# Altium PCB BMS_V3.PcbDoc
Units mm, origin at the board's own origin, x right, y up, seen from the top; angles counter-clockwise.
Board outline 100.33 x 85.22 mm, 2 copper layers (Top Layer, Bottom Layer); 63 components, 42 nets, 258 pads, 50 vias.
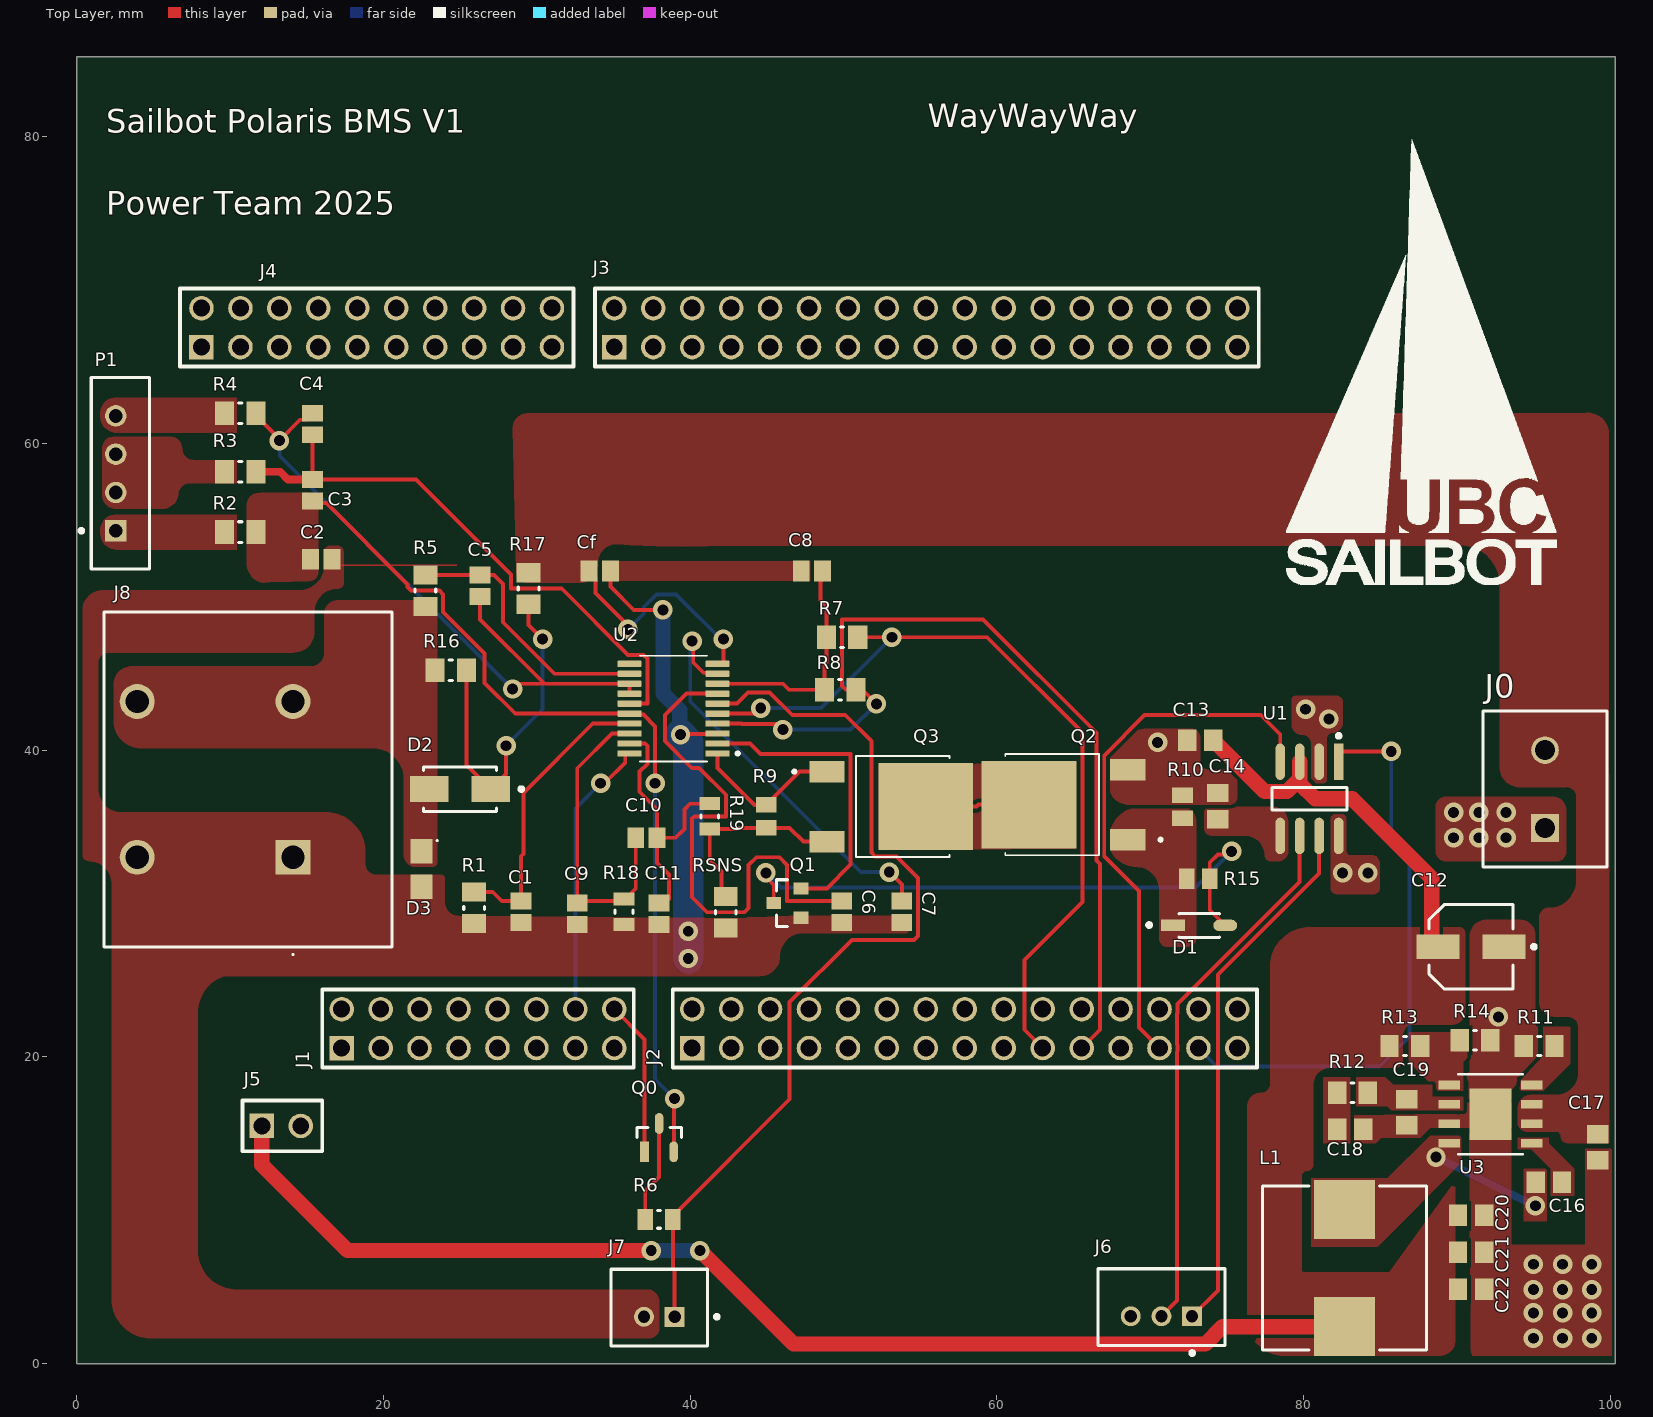
[diagram p0: Top Layer view]
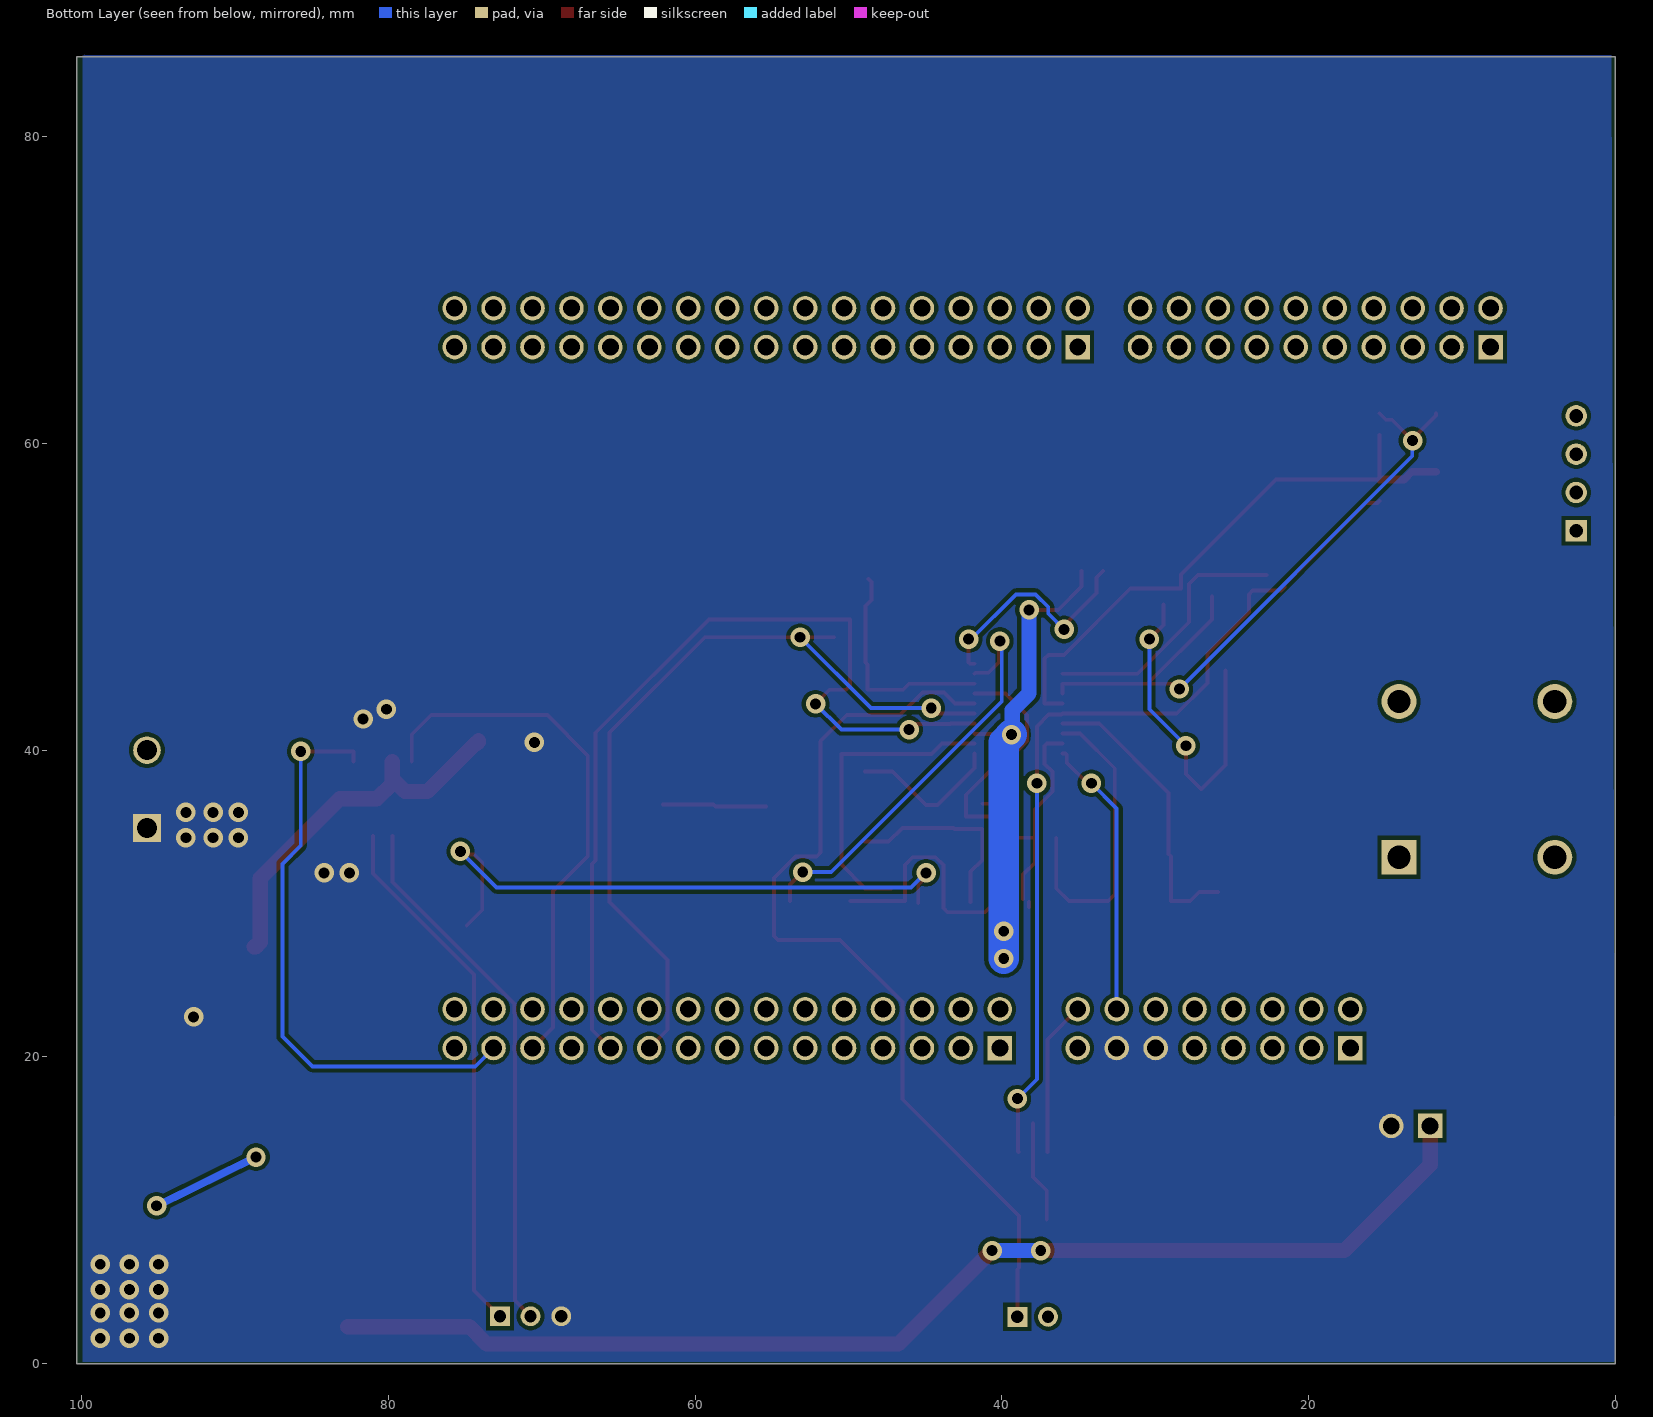
[diagram p1: Bottom Layer view, seen from below]

## Layer stack, top to bottom
Top Solder: solder mask 0.0102, Solder Resist, Dk 3.5
Top Layer: signal copper 0.0356
Dielectric 1: dielectric 0.32, FR-4, Dk 4.8
Bottom Layer: signal copper 0.0356
Bottom Solder: solder mask 0.0102, Solder Resist, Dk 3.5

## Board outline
0,0 100.33,0 100.33,85.217 0,85.217

## Design rules (kind name [scope] priority, off if disabled: settings)
Clearance [All] p1: gap=0.254 ignorepadtopadclearanceinfootprint=TRUE
PlaneConnect [All] p1: planeconnectstyle=Direct reliefexpansion=0.508 reliefentries=4 reliefconductorwidth=0.254 reliefairgap=0.254
PolygonConnect [All] p1: connectstyle=Direct reliefconductorwidth=0.254 reliefentries=4 polygonreliefangle="90 Angle" airgapwidth=0.254
RoutingVias [All] p1: holewidth=0.711 width=1.27 viastyle="Through Hole" minholewidth=0.711 minwidth=1.27 maxholewidth=0.711 maxwidth=1.27
SolderMaskExpansion [All] p1: expansion=0.13 istentingtop=FALSE useseparateexpansions=TRUE expansionbottom=0.13 istentingbottom=FALSE
SupplyNets "Schematic Supply Nets_1" [InNet('5VIN')] p1: voltage=0.000
SupplyNets "Schematic Supply Nets" [InNet('GND')] p2: voltage=0.000
Width [All] p1: maxlimit=0.254 minlimit=0.254 preferedwidth=0.254
29 further rules are at their usual default settings.

## Components (designator, comment, footprint, x,y, rotation, side; value= is the part's Value field where it differs from the comment)
C1 "1 uF 0805" CAPC2013X140X50LL20T25 28.973,29.461 r270 top
C2 "1 uF 0805" CAPC2013X140X50LL20T25 15.937,52.451 r180 top
C3 "1 uF 0805" CAPC2013X140X50LL20T25 15.367,56.958 r90 top
C4 "1 uF 0805" CAPC2013X140X50LL20T25 15.367,61.279 r90 top
C5 "1 uF 0805" CAPC2013X140X50LL20T25 26.289,50.735 r90 top
C6 "1 uF 0805" CAPC2013X140X50LL20T25 49.879,29.461 r90 top
C7 "1 uF 0805" CAPC2013X140X50LL20T25 53.806,29.461 r90 top
C8 "4.7 uF 0805" CAPC2013X140X50LL20T25 47.944,51.689 r0 top
C9 "0.1 uF" CAPC2013X140X50LL20T25 32.639,29.337 r270 top
C10 "0.1 uF" CAPC2013X140X50LL20T25 37.149,34.29 r180 top
C11 "0.1 uF" CAPC2013X140X50LL20T25 37.973,29.337 r90 top
C12 "10uF" FP-FKC-MFG 90.932,27.178 r180 top
C13 "0.1 uF" CAPC2013X135X45NL10T25 73.279,40.64 r0 top
C14 "0.1 uF" CAPC2013X135X45NL10T25 74.422,36.361 r270 top
C16 "0.1 uF" CAPC2013X135X45NL10T25 96.012,11.817 r0 top
C17 "10 uF" CAPC2013X135X45NL10T25 99.187,14.103 r90 top
C18 "3.3 nF" CAPC2013X135X45NL10T25 83.058,15.278 r180 top
C19 "47pF" CAPC2013X135X45NL10T25 86.741,16.389 r90 top
C20 "22 uF" CAPC2013X135X45NL10T25 90.932,9.658 r180 top
C21 "22 uF" CAPC2013X135X45NL10T25 90.932,7.245 r180 top
C22 "22 uF" CAPC2013X135X45NL10T25 90.932,4.832 r180 top
Cf "10 uF 0805" CAPC2013X140X50LL20T25 34.098,51.689 r180 top
D1 "1N5819HW" FP-SOD123-IPC_A 73.201,28.575 r0 top
D2 "CDBA540-HF" FP-DO-214AC-MFG 24.987,37.465 r180 top value=380pF
D3 "SMF24A-HE3-08" DIOM2818X11N 22.479,32.251 r270 top
J0 "1729128" PHOE-1729128-2_V 95.758,37.465 r90 top
J1 "CN8 CONN HDR 16POS" CN8_8X2_PADS 17.272,20.574 r90 top
J2 "CN9 CONN HDR 30POS" CN9_15X2_PADS 40.132,20.574 r90 top
J3 "CN10 CONN HDR 34POS" CN10_17X2_PADS 35.052,66.294 r90 top
J4 "CN7 CONN HDR 20POS" CN7_10X2_PADS 8.128,66.294 r90 top
J5 "5V_EXT" 5V_EXT 12.065,15.494 r90 top
J6 "440054-3" FP-440054-3-MFG 70.739,3.683 r0 top
J7 "440054-2" FP-440054-2-MFG 37.989,3.648 r0 top
J8 "39970-0102" 399700102 14.097,33.02 r90 top
L1 "5.5 uH" WE-HCI_1050 82.677,6.229 r0 top
P1 "B4B-EH-A(LF)(SN)" JST-B4B-EH-A_V 2.54,58.059 r90 top
Q0 "2N7002NXAKR" FP-SOT23-IPC_B 37.973,14.732 r90 top
Q1 "IRLML6401TRPBF" FP-SOT23-MFG 46.336,30.032 r180 top
Q2 "TSM090N03CPROG" TRANS_TSM090N03CPROG 64.348,36.449 r180 top
Q3 "TSM090N03CPROG" TRANS_TSM090N03CPROG 53.127,36.322 r0 top
R1 "100 Ohm 0805" RESC2013X60X30ML20T20 25.908,29.718 r90 top
R2 "100 Ohm 0805" RESC2013X60X30ML20T20 10.659,54.229 r0 top
R3 "100 Ohm 0805" RESC2013X60X30ML20T20 10.659,58.166 r0 top
R4 "100 Ohm 0805" RESC2013X60X30ML20T20 10.659,61.976 r0 top
R5 "100 Ohm 0805" RESC2013X60X30ML20T20 22.733,50.41 r90 top
R6 "RC0805FR-0710KL" RESC2013X60X35NL10T20 37.973,9.398 r180 top
R7 "10k Ohm 0805" RESC2013X60X30ML20T20 49.911,47.371 r180 top
R8 "10k Ohm 0805" RESC2013X60X30ML20T20 49.784,43.942 r180 top
R9 "ERA-6AEB105V" RESC2013X60X40LL20T25 44.958,35.687 r90 top
R10 "ERA-6AEB105V" RESC2013X60X40LL20T25 72.114,36.321 r270 top
R11 "200k" RESC2013X60X35ML10T20 95.377,20.707 r0 top
R12 "14k" RESC2013X60X35ML10T20 83.201,17.659 r0 top
R13 "115k" RESC2013X60X35ML10T20 86.614,20.707 r180 top
R14 "22.1k" RESC2013X60X35ML10T20 91.186,21.082 r180 top
R15 "1M Ohm" RESC2013X60X40LL20T25 73.14,31.623 r0 top
R16 "10k Ohm 0805" RESC2013X60X30ML20T20 24.384,45.212 r0 top
R17 "100 Ohm 0805" RESC2013X60X30ML20T20 29.464,50.546 r90 top
R18 "100" RESC2013X50X30LL20T20 35.687,29.464 r90 top
R19 "100" RESC2013X50X30LL20T20 41.275,35.687 r90 top
RSNS "5m Ohm 0805" RESC2013X60X30ML20T20 42.319,29.436 r270 top
U1 "MCP2562FDT-H/SN" FP-C04-057-SN-IPC_A 80.391,36.83 r270 top
U2 "BQ7692006PW" BQ7692006PW 38.913,42.713 r180 top
U3 "AP64350SP-13" SO-8EP_DIO 92.202,16.262 r180 top

## Footprints (in the part's own frame and the unit in brackets; to place one, negate y for a bottom-side part, rotate by r counter-clockwise, add the part's x,y. Pads: shape width x height; smd on the part's side, far side on the other; paste and mask are expansions set on the pad)
5V_EXT [mm]
  rect 1.6x1.6 hole 1.1: 1(0,0)
  round 1.6 hole 1.1: 2(0,-2.54)
  silkscreen extent -1.65,-3.94 1.65,1.27
399700102 [mm]
  rect 2.28x2.28 hole 1.52: 1(0,0)
  round 2.28 hole 1.52: 2(0,10.16) 3(10.16,0) 4(10.16,10.16)
  silkscreen extent -6.4,-6.47 16,12.33
BQ7692006PW [mm]
  rrect25% 1.57x0.41 smd: 1(-2.87,2.925) 2(-2.87,2.275) 3(-2.87,1.625) 4(-2.87,0.975) 5(-2.87,0.325) 6(-2.87,-0.325) 7(-2.87,-0.975) 8(-2.87,-1.625) 9(-2.87,-2.275) 10(-2.87,-2.925) 11(2.87,-2.925) 12(2.87,-2.275) 13(2.87,-1.625) 14(2.87,-0.975) 15(2.87,-0.325) 16(2.87,0.325) 17(2.87,0.975) 18(2.87,1.625) 19(2.87,2.275) 20(2.87,2.925)
  silkscreen extent -4.29,-3.45 2.2,3.45, body extent -3.2,-3.25 3.2,3.25, height 1.2
CAPC2013X135X45NL10T25 [mm] "Chip Capacitor, 2-Leads, Body 2.10x1.35mm, IPC Medium Density"
  rect 1.2x1.4 smd: 1(-0.85,0) 2(0.85,0)
  body extent -1.05,-0.67 1.05,0.67, height 1.35
CAPC2013X140X50LL20T25 [mm] "Chip Capacitor, 2-Leads, Body 2.00x1.25mm, IPC High Density"
  rect 1.1x1.35 smd: 1(-0.7,0) 2(0.7,0)
  body extent -1.1,-0.72 1.1,0.72, height 1.4
CN7_10X2_PADS [mm]
  rect 1.6x1.6 hole 1.1: 1(0,0)
  round 1.6 hole 1.1: 2(2.54,0) 3(0,-2.54) 4(2.54,-2.54) 5(0,-5.08) 6(2.54,-5.08) 7(0,-7.62) 8(2.54,-7.62) 9(0,-10.16) 10(2.54,-10.16) 11(0,-12.7) 12(2.54,-12.7) 13(0,-15.24) 14(2.54,-15.24) 15(0,-17.78) 16(2.54,-17.78) 17(0,-20.32) 18(2.54,-20.32) 19(0,-22.86) 20(2.54,-22.86)
  silkscreen extent -1.27,-24.26 3.81,1.4
CN8_8X2_PADS [mm]
  rect 1.6x1.6 hole 1.1: 1(0,0)
  round 1.6 hole 1.1: 2(2.54,0) 3(0,-2.54) 4(2.54,-2.54) 5(0,-5.08) 6(2.54,-5.08) 7(0,-7.62) 8(2.54,-7.62) 9(0,-10.16) 10(2.54,-10.16) 11(0,-12.7) 12(2.54,-12.7) 13(0,-15.24) 14(2.54,-15.24) 15(0,-17.78) 16(2.54,-17.78)
  silkscreen extent -1.27,-19.05 3.81,1.27
CN9_15X2_PADS [mm]
  rect 1.6x1.6 hole 1.1: 1(0,0)
  round 1.6 hole 1.1: 2(2.54,0) 3(0,-2.54) 4(2.54,-2.54) 5(0,-5.08) 6(2.54,-5.08) 7(0,-7.62) 8(2.54,-7.62) 9(0,-10.16) 10(2.54,-10.16) 11(0,-12.7) 12(2.54,-12.7) 13(0,-15.24) 14(2.54,-15.24) 15(0,-17.78) 16(2.54,-17.78) 17(0,-20.32) 18(2.54,-20.32) 19(0,-22.86) 20(2.54,-22.86) 21(0,-25.4) 22(2.54,-25.4) 23(0,-27.94) 24(2.54,-27.94) 25(0,-30.48) 26(2.54,-30.48) 27(0,-33.02) 28(2.54,-33.02) 29(0,-35.56) 30(2.54,-35.56)
  silkscreen extent -1.27,-36.83 3.81,1.27
CN10_17X2_PADS [mm]
  rect 1.6x1.6 hole 1.1: 1(0,0)
  round 1.6 hole 1.1: 2(2.54,0) 3(0,-2.54) 4(2.54,-2.54) 5(0,-5.08) 6(2.54,-5.08) 7(0,-7.62) 8(2.54,-7.62) 9(0,-10.16) 10(2.54,-10.16) 11(0,-12.7) 12(2.54,-12.7) 13(0,-15.24) 14(2.54,-15.24) 15(0,-17.78) 16(2.54,-17.78) 17(0,-20.32) 18(2.54,-20.32) 19(0,-22.86) 20(2.54,-22.86) 21(0,-25.4) 22(2.54,-25.4) 23(0,-27.94) 24(2.54,-27.94) 25(0,-30.48) 26(2.54,-30.48) 27(0,-33.02) 28(2.54,-33.02) 29(0,-35.56) 30(2.54,-35.56) 31(0,-38.1) 32(2.54,-38.1) 33(0,-40.64) 34(2.54,-40.64)
  silkscreen extent -1.27,-42.04 3.81,1.27
DIOM2818X11N [mm] "Molded Diode, 2-Leads, Body 2.80x1.80mm, IPC Medium Density"
  rect 1.6x1.45 smd: 1(-1.15,0) 2(1.15,0)
  silkscreen extent -1.9,0.98 -1.8,1.07, body extent -1.67,-0.95 1.67,0.95, height 1.08
FP-440054-2-MFG [mm]
  rect 1.3x1.3 hole 0.8 paste-2539.97 mask+0: 1(1,-0.6)
  round 1.3 hole 0.8 paste-2539.97 mask+0: 2(-1,-0.6)
  silkscreen extent -3.15,-2.5 3.88,2.5, body extent -3.25,-2.6 3.25,2.6, height 0.25
FP-440054-3-MFG [mm]
  rect 1.3x1.3 hole 0.8 paste-2539.97 mask+0: 1(2,-0.6)
  round 1.3 hole 0.8 paste-2539.97 mask+0: 2(0,-0.6) 3(-2,-0.6)
  silkscreen extent -4.15,-3.12 4.15,2.5, body extent -4.25,-2.6 4.25,2.6, height 0.25
FP-C04-057-SN-IPC_A [mm]
  rect 2.377x0.622 smd paste+0 mask+0: 1(-2.418,1.905)
  rrect100% 2.377x0.622 smd paste+0 mask+0: 2(-2.418,0.635) 3(-2.418,-0.635) 4(-2.418,-1.905) 5(2.418,-1.905) 6(2.418,-0.635) 7(2.418,0.635) 8(2.418,1.905)
  silkscreen extent -4.23,-2.45 0.73,2.45, body extent -4.11,-2.95 4.11,2.95, height 0.25
FP-DO-214AC-MFG [mm]
  rect 2.5x1.7 smd paste+0 mask+0: 1(-2,0) 2(2,0)
  silkscreen extent -4.13,-1.45 2.37,1.45, body extent -3.35,-1.55 3.35,1.55, height 0.25
FP-FKC-MFG [mm]
  rect 2.8x1.6 smd paste+0 mask+0: 1(-2.15,0) 2(2.15,0)
  silkscreen extent -4.23,-2.75 2.75,2.75, body extent -3.8,-3 3.8,3, height 0.25
FP-SOD123-IPC_A [mm]
  rect 1.557x0.742 smd paste+0 mask+0: 1(-1.7,0)
  rrect100% 1.557x0.742 smd paste+0 mask+0: 2(1.7,0)
  silkscreen extent -3.39,-0.78 1.33,0.78, body extent -1.83,-0.77 1.83,0.77, height 1.45
FP-SOT23-IPC_B [mm]
  rect 1.355x0.562 smd paste+0 mask+0: 1(-0.925,0.95)
  rrect100% 1.355x0.562 smd paste+0 mask+0: 2(-0.925,-0.95) 3(0.925,0)
  silkscreen extent 0,-1.45 0.65,1.45, body extent -1.85,-1.7 1.85,1.7, height 0.25
FP-SOT23-MFG [mm]
  rect 0.972x0.802 smd paste+0 mask+0: 1(-0.885,0.95) 2(-0.885,-0.95) 3(0.885,0)
  silkscreen extent -0.02,-1.52 0.7,1.52, body extent -1.47,-1.62 1.47,1.62, height 0.25
JST-B4B-EH-A_V [mm] "Header, 4-Leads, Body 12.5x3.8mm, Pitch 2.5mm"
  rect 1.4x1.4 hole 0.9: 1(-3.75,0)
  round 1.4 hole 0.9: 2(-1.25,0) 3(1.25,0) 4(3.75,0)
  silkscreen extent -6.25,-2.2 6.25,2.37, body extent -6.25,-2.2 6.25,1.6, height 6
PHOE-1729128-2_V [mm] "Receptacle, 2-Leads, Body 8.1x10.16mm, Pitch 5.08mm"
  rect 1.8x1.8 hole 1.3: 1(-2.54,0)
  round 1.8 hole 1.3: 2(2.54,0)
  silkscreen extent -5.08,-4.05 5.08,4.05, body extent -5.65,-4.05 5.08,4.05, height 10.01
RESC2013X50X30LL20T20 [mm] "Chip Resistor, 2-Leads, Body 2.00x1.25mm, IPC High Density"
  rect 0.85x1.35 smd: 1(-0.825,0) 2(0.825,0)
  silkscreen extent -0.1,-0.58 0.1,0.57, body extent -1.1,-0.72 1.1,0.72, height 0.5
RESC2013X60X30ML20T20 [mm] "Chip Resistor, 2-Leads, Body 2.00x1.25mm, IPC Low Density"
  rect 1.25x1.55 smd: 1(-1.025,0) 2(1.025,0)
  silkscreen extent -0.1,-0.67 0.1,0.67, body extent -1.1,-0.72 1.1,0.72, height 0.6
RESC2013X60X35ML10T20 [mm] "Chip Resistor, 2-Leads, Body 2.1x1.35mm, IPC Low Density"
  rect 1.2x1.45 smd: 1(-1,0) 2(1,0)
  silkscreen extent -0.1,-0.63 0.1,0.62, body extent -1.05,-0.68 1.05,0.67, height 0.6
RESC2013X60X35NL10T20 [mm] "Chip Resistor, 2-Leads, Body 2.1x1.35mm, IPC Medium Density"
  rect 1x1.35 smd: 1(-0.9,0) 2(0.9,0)
  silkscreen extent -0.1,-0.58 0.1,0.58, body extent -1.05,-0.68 1.05,0.67, height 0.6
RESC2013X60X40LL20T25 [mm] "Chip Resistor, 2-Leads, Body 2.00x1.25mm, IPC High Density"
  rect 1x1.35 smd: 1(-0.75,0) 2(0.75,0)
  body extent -1.1,-0.72 1.1,0.72, height 0.6
SO-8EP_DIO [mil]
  rect 56x22 smd paste+0 mask+0: 1(-106,75) 2(-106,25) 3(-106,-25) 4(-106,-75) 5(106,-75) 6(106,-25) 7(106,25) 8(106,75)
  rect 107x132 smd paste-65.5 mask+0: EPAD(0,0)
  silkscreen extent -83,-102 83,103, body extent -120,-97 120,97, height 64
TRANS_TSM090N03CPROG [mm]
  rect 2.29x1.4 smd: 1(-4.19,2.285) 3(-4.19,-2.285)
  rect 6.18x5.69 smd paste-4: 2(2.245,0)
  silkscreen extent -6.43,-3.3 3.8,3.3, body extent -5.05,-3.3 5.05,3.3, height 2.3
WE-HCI_1050 [mm] "SMT Flat Wire High Current Inductor, body 10.2x10.2mm"
  rect 4x3.85 smd: 1(0,3.825) 2(0,-3.825)
  silkscreen extent -5.35,-5.35 5.35,5.35, body extent -5.1,-5.5 5.1,5.5, height 5

## Part data
C1 C2 C3 C4 C5 C6 C7 C8 C9 C10 Cf: library part CMP-2007-03234-1, Manufacturer=Kemet, Part Number=C0805C105K3RACTU
C11: library part CMP-2007-03234-1, Manufacturer=Kemet
C12: library part CMP-05427-000030-1, "CAP ALUM 10UF 20% 50V SMD", Case/Package=Radial, Dielectric Material=Aluminium, ESR (Equivalent Series Resistance)=1.52R, Leakage Current=3uA, Max Operating Temperature=105°C, Min Operating Temperature=-55°C, Package Quantity=1000, Ripple Current=85mA, Tolerance=20%, Voltage=50V, Capacitance=10uF, Construction=Cylindrical, Contact Plating=Tin, Diameter=5mm, Height=5.8mm, Height - Seated (Max)=0.228inch, Impedance=1.52R, Lead Free="Lead Free", Length=5.8mm, Life (Hours)=2000Hour, Material=Aluminium, Mount="Surface Mount", Number of Pins=2, Packaging="Tape and Reel", Radiation Hardening=No, REACH SVHC="No SVHC", Ripple Current (AC)=85mA, RoHS Compliant=Yes, Series=FK, Termination=SMD/SMT, Voltage Rating=50V, Voltage Rating (DC)=50V, Width=6.5mm
C13 C14 C16 C17 C18 C19 C20 C21 C22: library part CMP-1662-00015-2, "Chip Capacitor, 4.7 uF, +/- 10%, 16 V, -55 to 85 degC, 0805 (2012 Metric), RoHS, Tape and Reel", Capacitance="4.7 uF", Case Code (Imperial)=0805, Case Code (Metric)=2012, Max Operating Temperature="85 degC", Min Operating Temperature="-55 degC", Package Quantity=3000, PartNumber=GRM21BR61C475KA88L, Tolerance=10%, Type (Capacitors)=X5R, Voltage Rating="16 V", Case\/Package=0805, ComponentLink1Description="Manufacturer URL", ComponentLink1URL=http://www.murata.com/, ComponentLink2Description=Datasheet, ComponentLink2URL=http://search.murata.co.jp/Ceramy/image/img/A01X/G101/ENG/GRM21BR61C475KA88-01.pdf, DatasheetVersion=03/2016, Height="1.25 mm", Length="2 mm", Mount="Surface Mount", Mounting Technology="Surface Mount", PackageDescription="2-Pin Surface Mount Device, Body 2 x 1.25 mm", PackageReference=0805, Packaging="Tape and Reel", Pins=2, Radiation Hardening=No, REACH SVHC="No SVHC", RoHSCompliant=true, Voltage Rating (DC)="16 V", Width="1.25 mm"
D1: library part CMP-0303-00003-3, "DIODE SCHOTTKY 40V 1A SOD123", Average Rectified Current=1A, Capacitance=110pF, Case/Package=SOD-123-2, Forward Voltage=450mV, Max Forward Surge Current (Ifsm)=25A, Max Operating Temperature=125°C, Max Power Dissipation=450mW, Max Repetitive Reverse Voltage (Vrrm)=40V, Min Operating Temperature=-65°C, Package Quantity=3000, Peak Reverse Current=50uA, Contact Plating=Tin, Current Rating=1A, Element Configuration=Single, Forward Current=1A, Height=1.25mm, Lead Free="Lead Free", Length=2.85mm, Max Reverse Voltage (DC)=40V, Number of Pins=2, Output Current=1A, Packaging="Tape and Reel", Peak Non-Repetitive Surge Current=25A, Polarity=Standard, Radiation Hardening=No, REACH SVHC="No SVHC", Termination=SMD/SMT, Voltage Rating (DC)=40V, Weight=0.000353oz, Width=1.7mm
D2: library part CMP-20227-000001-1, "DIODE SCHOTTKY 40V 5A DO214AC", Capacitance=380pF, Forward Current=5A, Manufacturer=Comchip, Max Junction Temp=+150°C, Max Repetitive Reverse Voltage=40V, Max Surge Forward Current=125A, Package=DO-214AC, Peak Reverse Current=0.5mA, Temperature="-50°C to +150°C", Temperature Range Low=-50°C, Automotive=No, Category=Diode, ComponentLink2Description=Datasheet, ComponentLink2URL=http://www.comchiptech.com/admin/files/product/CDBA540-HF%20Thru504741.%20CDBA5200-HF%20RevC.pdf, Device Class L1="Discrete Semiconductors", Device Class L2=Diodes, Device Class L3="Schottky Diodes", Digikey Description="DIODE SCHOTTKY 40V 5A DO214AC", Height=2.5mm, Lead Free=Yes, Manufacturer Part Number=CDBA540-HF, Mouser Description="Schottky Diodes & Rectifiers 40V, 5A", Octopart=https://octopart.com/cdba540-hf-comchip-57839773, RoHS=TRUE, Standoff Height=0.08mm, Temperature Range High=+150°C
D3: library part CMP-004-00031-1, "Trans Voltage Suppressor Diode, 1000W, 24V V(RWM), Unidirectional, 1 Element, Silicon, DO-219AB", Max Operating Temperature=150°C, Min Operating Temperature=-55°C, Pins=2, RoHS Compliant=Yes
J0: library part CMP-2000-05815-1, "PCB Terminal Block, 13.5 A, 400 V, 2-Pin THD, RoHS, Bulk", Current Rating=13500mA, Manufacturer="Phoenix Contact", Package Description="2-Pin Through Hole Device, Body 8.1 x 10.16 mm, Pitch 5.08 mm", Package Reference=1729128-2, Package Version=03/2015, Voltage Rating=400V, Datasheet URL=https://datasheet.ciiva.com/16046/1729128-16046181.pdf, Datasheet Version=12/2013, Manufacturer URL=http://www.phoenixcontact.com/, Mounting Technology=ThroughHole, No. of Positions=2, No. of Rows=1, Orientation=Horizontal, Package URL=https://www.phoenixcontact.com/online/portal/pi/pxc/product_detail_page/!ut/p/b1/3VdJjqNKFDxLH8AFycySyWY2ozFsEPOMMQaDOX1XedGL_1Vdm5YXJleknhSKeBkvI6EA8ncAo3AYoDhBQGco6KN7VURTdemj9us_IEKEZo_YHiPAEWEFmDGOHMORkqKYCORBZxgL7ZoaZYcbFFUZ3fqxSY6GOuxydWUuHqz1ynmMFygu583Bob0Ewr6Sd_l-5m-kAueHiB0jpRwZwe58wwtkpxtMYd_LmGcDRU02dRNEyWt6Y2ti5pSyJ_reIkzIulrqApdnbT11V5jnCKbYNCvhEM1MCpPByat_X379-iThf08CI5GfOPqfBeS3BRoBOdD55AKVv0iLwCMq-2BrzXWSGRH7pUGD9uwXQjiph3xL0DKQwdGa0JImiIOmBNOestqgwTHSSs2oOep-78apyXQBvNi8ZLaFjvjWvcaUEBu0MC6Wbe-d6mB0FAebo2lUWinqYaZs5DAYzV0RP9yitUjnGJ0iI9xhZkT42OCQNUJJhkgWINNQLP2JFP6OpMg3JCVg70jqHT0lvKOnhHf0lPuOnnLf0VPuWx6_dxwUIvwk5WMkT0kLL1mh61l2yZVSzG3pYV_bqo-mj6uMKwKwdnnW8Jh5RTOJzMOA5c-eJDaZQw4mTMPH02PvS_ZAqNVjVTo2WyYLkwH_KU1mmmG5kjRhDqPXLwwVHvVOjCM60-fpXvTDfMGW1PVFVS1r4e4yVDk4ZdNbkUHvqPqQSeian4UD39fNKmachqdJ1NJbyk8rXT9mXTvPk3oE5meulKGgiruPJek-4I9hTT6G8ZLOyRSm2RRVbThERQad5OS28hdt4YW4vG0stgYYzsWsK4_7y6DZMjJSCqri1kyiZR5vD7pwIrNR7QwPHTcLTI5qT7eRlpHrdGiupYlqQDJ7zy_CND8fWWBoLRXxk1RVcXiBQwbTD4Xi7KL-FuO94t9xaqweXzH, Packing=Bulk, PartNumber=1729128, Pitch=5.08mm, RoHS=TRUE
J1: library part CMP-002-00076-1, "CN8 CONN HDR 16POS 0.1 STACK", Design Item ID="CN8 CONN HDR 16POS", Source=Schlib2.SchLib
J2: library part CMP-002-00077-1, "CN9 CONN HDR 30 POS  0.1 STACK", Design Item ID="CN9 CONN HDR 30POS", Source=Schlib2.SchLib
J3: library part CMP-002-00078-1, "CN10 CONN HDR 34 POS  0.1 STACK", Design Item ID="CN10 CONN HDR 34POS", Source=Schlib2.SchLib
J4: library part CMP-002-00075-1, "CN7 CONN HDR 20 POS  0.1 STACK", Design Item ID="CN7 CONN HDR 20POS", Source=Schlib2.SchLib
J5: library part CMP-013-000005-1, Design Item ID=5V_EXT, Source=Schlib2.SchLib
J6: library part CMP-03369-000008-1, "CONN HEADER VERT 3POS 2MM", Current Rating=3A, Manufacturer="TE Connectivity", Package=0, Temperature="-25°C to +105°C", Temperature Range High=+105°C, Temperature Range Low=-25°C, Voltage Rating=250V, Automotive=No, Category=Conn, ComponentLink2Description=Datasheet, ComponentLink2URL=https://www.te.com/usa-en/product-440054-3.datasheet.pdf, Conn Gender=Male, Conn Orientation=Vertical, Contact Material=Tin,Nickel, Device Class L1=Connectors, Device Class L2="Headers and Wire Housings", Device Class L3=unset, Digikey Description="CONN HEADER VERT 3POS 2MM", Footprint Url=https://www.te.com/commerce/DocumentDelivery/DDEController?Action=showdoc&DocId=Customer+Drawing%7F440054%7FF6%7Fpdf%7FEnglish%7FENG_CD_440054_F6.pdf%7F440054-3, Height=6.35mm, Lead Free=Yes, Manufacturer Part Number=440054-3, Mouser Description="Headers & Wire Housings 3 POS HDR VERT 2.0mm", Number Of Contacts=3, Number Of Rows=1, Octopart=https://octopart.com/440054-3-te+connectivity-40394845, Pitch=2mm, RoHS=TRUE
J7: library part CMP-03369-000005-1, "CONN HEADER VERT 2POS 2MM", Current Rating=3A, Manufacturer="TE Connectivity", Temperature="-25°C to +85°C", Temperature Range High=+85°C, Temperature Range Low=-25°C, Voltage Rating=250V, Automotive=No, Category=Conn, ComponentLink2Description=Datasheet, ComponentLink2URL=https://www.te.com/usa-en/product-440054-2.datasheet.pdf, Conn Gender=Male, Conn Orientation=Vertical, Contact Material=Tin,Nickel, Device Class L1=Connectors, Device Class L2="Headers and Wire Housings", Device Class L3=unset, Digikey Description="CONN HEADER VERT 2POS 2MM", Footprint Url=https://www.te.com/commerce/DocumentDelivery/DDEController?Action=showdoc&DocId=Customer+Drawing%7F440054%7FF6%7Fpdf%7FEnglish%7FENG_CD_440054_F6.pdf%7F440054-2, Height=6.35mm, Lead Free=Yes, Manufacturer Part Number=440054-2, Mouser Description="Headers & Wire Housings 2.0mm HDR 2pos VERT HPI", Number Of Contacts=2, Number Of Rows=1, Octopart=https://octopart.com/440054-2-te+connectivity-40237927, Package=440054-2, Pitch=2mm, RoHS=TRUE
J8: "10.16mm Beau Eurostyle Fixed Mount PCB Terminal Block, High Power 40A,  Circuits", Manufacturer_Name=Molex, Mouser Part Number=538-39970-0102, Datasheet Link=https://www.molex.com/pdm_docs/sd/399700102_sd.pdf, Geometry.Height=30mm, Manufacturer_Part_Number=39970-0102, Mouser Price/Stock=https://www.mouser.co.uk/ProductDetail/Molex/39970-0102?qs=E1QQzziZK0%252BNAsw%2FMf08Pw%3D%3D
L1: library part CMP-0226-00138-2, Ambient Temperature Range High=100°C, Ambient Temperature Range Low=-40°C, Case/Package=1050, Current Rating=10A, DC Resistance (DCR)=10.3mΩ, Inductance=5.5µH, Inductance Tolerance=20%, Max Operating Temperature=150°C, Saturation Current=12A, Self Resonant Frequency=30MHz, Series Resistance=10.3Ω, Test Frequency=100kHz, Composition=Wirewound, Depth=10.2mm, Height=4.7mm, Height - Seated (Max)=5.0038mm, Lead Free="Lead Free", Length=10.5mm, Max DC Current=10A, Min Operating Temperature=-40°C, Mount="Surface Mount", NexarPartId=7866439, Number of Pins=2, Packaging="Cut Tape (CT)", REACH SVHC=Unknown, Resistance=10.3mΩ, RMS Current (Irms)=10A, RoHS=Compliant, Shielding=Shielded, Termination=SMD/SMT, Tolerance=20%, Width=10.2mm
P1: library part CMP-2000-05904-1, "Male Header, Pitch 2.5 mm, 1 x 4 Position, Height 6 mm, Tail Length 3.2 mm, -25 to 85 degC, RoHS, Bulk", Manufacturer=JST, Package Description="Male Header, Pitch 2.5 mm, 1 x 4 Position, Height 6 mm, Tail Length 3.2 mm", Package Reference=B4B-EH-A, Datasheet URL=http://www.jst-mfg.com/product/pdf/eng/eEH.pdf, Datasheet Version=12/2012, Manufacturer URL=http://www.jst.com/home2.html, Mounting Technology=SurfaceMount, No of Positions=4, Pitch=2.5mm, Style/Orientation=StraightHeader/Plug, Termination=Crimp, Type=ShroudedHeader
Q0: library part CMP-14409-000026-2, "2N7002NXAK/SOT23/TO-236AB"
Q1: library part CMP-32901-000098-1, "MOSFET P-CH 12V 4.3A SOT-23", Continuous Drain Current=-4.3A, Drain To Source Breakdown Voltage=-12V, Drain To Source Resistance=0.05Ω, Gate To Source Voltage=8V, Input Capacitace At Vds="830pF @ -10V", Manufacturer=Infineon, Max Forward Diode Voltage=-1.2V, Max Junction Temp=+150°C, Package=SOT23, Power Dissipation=1.3W, Pulse Drain Current=-34A, Temperature="-55°C to +150°C", Temperature Range Low=-55°C, Automotive=No, Category=Trans, ComponentLink2Description=Datasheet, ComponentLink2URL=https://www.infineon.com/dgdl/irlml6401pbf.pdf?fileId=5546d462533600a401535668b96d2634, Depletion Mode=False, Device Class L1="Discrete Semiconductors", Device Class L2=Transistors, Device Class L3=MOSFETs, Digikey Description="MOSFET P-CH 12V 4.3A SOT-23", Drain To Source Voltage=-12V, Gate Charge At Vgs="10nC @ -5V", Height=1.12mm, Ipc Land Pattern Name=SOT95P237X100-3, Lead Free=Yes, Manufacturer Part Number=IRLML6401TRPBF, Number Of Channels=1, Number Of P Channels=1, Octopart=https://octopart.com/irlml6401trpbf-infineon-65874987, Reverse Recovery Charge=8nC, Reverse Recovery Time=22ns, RoHS=TRUE, Rthja Max=75°C/W, Standoff Height=0.01mm, Temperature Range High=+150°C, Threshold Vgs Max=-0.95V, Threshold Vgs Min=-0.4V, Turn Off Delay Time=250ns, Turn On Delay Time=11ns
Q2 Q3: library part CMP-013-00034-1, "N-Channel 30 V 50A (Tc) 40W (Tc) Surface Mount TO-252 (DPAK)", Case/Package="TO-252-3 Taiwan Semiconductor", Check_prices=https://www.snapeda.com/parts/TSM090N03CPROG/taiwan/view-part/?ref=eda, Component Type=Standard, Design Item ID=TSM090N03CPROG, MF="Taiwan Semiconductor", MP=TSM090N03CPROG, Pins=3, SnapEDA_Link=https://www.snapeda.com/parts/TSM090N03CPROG/taiwan/view-part/?ref=snap, Source=TSM090N03CPROG.SchLib
R1 R2 R3 R4 R5 R7 R8 R16 R17 RSNS: library part CMP-2001-01991-1, Manufacturer="KOA Speer", Part Number=RK73H2ATTD1000F
R6: library part CMP-1659-00013-4, "Chip Resistor, 10 KOhm, +/- 1%, 0.125 W, -55 to 155 degC, 0805 (2012 Metric), RoHS, Tape and Reel", Manufacturer=Yageo, Max Operating Temperature="155 degC", Min Operating Temperature="-55 degC", Package Quantity=5000, Voltage Rating="150 V", ComponentLink1Description="Manufacturer URL", ComponentLink1URL=http://www.yageo.com/, ComponentLink2Description=Datasheet, ComponentLink2URL=http://www.yageo.com/documents/recent/PYu-RC_Group_51_RoHS_L_04.pdf, DatasheetVersion="Rev. 4, 02/2016", Height="0.5 mm", Length="2 mm", Mount="Surface Mount", Mounting Technology="Surface Mount", PackageDescription="2-Pin Surface Mounted Device, Body 2 x 1.25 mm", PackageReference=0805, Packaging="Tape and Reel", Pins=2, REACH SVHC="No SVHC", RoHSCompliant=true
R9 R10: library part CMP-2001-00584-1, Manufacturer=Panasonic, Part Number=ERA-6AEB105V
R11 R12 R13 R14: library part CMP-2100-03671-1, "Chip Resistor, 1 KOhm, +/- 1%, 125 mW, -55 to 155 degC, 0805 (2012 Metric), RoHS, Tape and Reel", Case Code (Imperial)=0805, Case Code (Metric)=2012, Manufacturer=Yageo, Max Operating Temperature=155degC, Max Power Dissipation=125mW, Min Operating Temperature=-55degC, Package Description="2-Pin Surface Mounted Device, Body 2 x 1.25 mm", Package Quantity=1, Resistance=1KOhm, Temperature Coefficient=100ppm/degreesC, Tolerance=1%, Voltage Rating=150V, Case/Package=0805, Composition=ThickFilm, Datasheet URL=http://www.yageo.com/NewPortal/yageodocoutput?fileName=/pdf/R-Chip/PYu-RC_Group_51_RoHS_L_5.pdf, Datasheet Version="Rev. 5, 10/2016", Depth=1.25mm, Height=0.024inch, Lead Free=LeadFree, Length=0.079inch, Manufacturer URL=http://www.yageo.com/, Military Standard=Not, Number of Pins=2, Number of Terminations=2, Package Reference=0805, Packaging=TapeandReel, Power Rating=125mW, REACH SVHC=Unknown, RoHSCompliant=true, Termination=SMD/SMT, Voltage Rating (DC)=150V, Width=0.049inch
R15: library part CMP-2001-00584-1, Manufacturer=Panasonic, Part Number=ERA-6AEB105V
R18 R19: library part CMP-2001-04901-1, Manufacturer="Vishay Dale", Part Number=CRCW0805100RFKEA
U1: library part CMP-06279-000047-1, "IC TRANSCEIVER 1/1 8SOIC", Case/Package=SOIC, Max Operating Temperature=150°C, Max Supply Voltage=5.5V, Min Operating Temperature=-40°C, Min Supply Voltage=4.5V, Operating Supply Current=70mA, Package Quantity=3300, Data Rate=8Mbps, Mount="Surface Mount", Number of Pins=8, Number of Transceivers=1, Packaging="Tape and Reel", Receiver Hysteresis=200mV, RoHS Compliant=Yes, Series=-, Weight=0.019048oz
U2: library part CMP-031-00007-1, "3 to 5-Series Cell Li-Ion and Li-Phosphate Battery Monitor (bq76940 Family)", Case/Package="TSSOP-20 Texas Instruments", Check_prices=https://www.snapeda.com/parts/BQ7692006PW/Texas+Instruments/view-part/?ref=eda, Component Type=Standard, Design Item ID=BQ7692006PW, MF="Texas Instruments", MP=BQ7692006PW, Pins=20, SnapEDA_Link=https://www.snapeda.com/parts/BQ7692006PW/Texas+Instruments/view-part/?ref=snap, Source=BQ7692006PW.SchLib
U3: library part CMP-013-000013-1, "No Description Available", Mfr_Name="Diodes Inc", Design Item ID=AP64350SP-13, RefDes=RefDes, Source=Schlib2.SchLib, Type=Type

## Via types
v1: diameter 1.27, hole 0.711, Top Layer to Bottom Layer, 50 vias

## Nets (pads, with @x,y where several pads share a name; then routed paths per layer and width w, separated by ;. In a path a pad name is that pad's centre, name@x,y a point inside that pad or via, vN(x,y) a via of type N, cw(c..) or ccw(c..) an arc to the next point about the centre after c; other vN are vias at no path point)
"3.3 VIN": C14.2 U1.5
3.3VIN: C8.2 R7.2 R8.2 U2.8 | length 14.7
  Top Layer w0.254: U2.8 46.061,44.338 46.457,43.942 R8.2 48.759,45.593 48.886,45.72 R7.2 48.886,49.417 48.514,49.789 48.514,50.989 C8.2@48.706,51.181
5VIN: C12.2 C13.2 C20.2 C21.2 C22.2 J5.1 L1.2 R13.2 U1.3 | length 103.8
  Top Layer w0.254: U1.3@79.756,38.37 U1.3
  Top Layer w1: J5.1 12.065,12.954 17.653,7.366 v1(37.465,7.366) ; v1(40.64,7.366) 46.736,1.27 73.6,1.27 74.734,2.404 L1.2 ; C13.2 74.129,40.54 74.229,40.44 74.338,40.44 77.473,37.305 78.927,37.305 79.756,38.134 U1.3 ; 79.756,37.846 80.772,36.83 83.185,36.83 88.362,31.653 88.362,27.478 88.662,27.178 C12.2
  Bottom Layer w1: v1(37.465,7.366) v1(40.64,7.366)
BAT+: C17.2 Cf.2 J0.2 R17.2 U2.10 U3.2 U3.3 | length 15.4
  Top Layer w0.254: Cf.2 33.821,51.266 33.821,50.253 35.941,48.133 v1(35.941,47.879) ; U2.10 42.086,45.638 42.164,45.716 v1(42.164,47.244)
  Bottom Layer w0.254: v1(35.941,47.879) 36.971,48.909 36.971,49.33 37.806,50.165 39.076,50.165 41.997,47.244 v1(42.164,47.244)
BAT-: C12.1 C13.1 C14.1 C17.1 C18.1 C19.1 C20.1 C21.1 C22.1 J0.1 J1.11 J1.13 J5.2 J6.3 Q2.3 R10.1 R11.1 R14.1 U1.2 U1.8 U3.7 U3.EPAD
  other v1: 94.996,1.651 96.901,1.651 98.806,1.651 94.996,3.302 96.901,3.302 98.806,3.302 94.996,4.826 96.901,4.826 98.806,4.826 94.996,6.477 96.901,6.477 98.806,6.477 92.71,22.606 82.55,32.004 84.201,32.004 89.789,34.29 91.44,34.29 93.218,34.29 89.789,35.941 91.44,35.941 93.218,35.941 70.485,40.513 81.661,42.037 80.137,42.672
CAN_RX_3.3V: J2.25 U1.4 | length 35.4
  Top Layer w0.254: J2.25 69.266,21.92 69.266,30.817 67.012,33.071 67.012,39.667 69.636,42.291 77.216,42.291 78.486,41.021 U1.4
CAN_TX_3.3V: J2.27 U1.1 | length 38.3
  Top Layer w0.254: U1.1 82.296,39.929 v1(85.725,39.929)
  Bottom Layer w0.254: J2.27 74.346,19.38 84.963,19.38 86.919,21.336 86.919,32.588 85.725,33.782 v1(85.725,39.929)
CANH: J6.1 U1.7 | length 34.8
  Top Layer w0.254: J6.1 74.422,4.766 74.422,25.36 81.026,31.964 U1.7
CANL: J6.2 U1.6 | length 35.1
  Top Layer w0.254: J6.2 71.755,4.099 71.755,20.277 ccw(c70.612,20.574) 71.755,20.871 71.755,22.817 71.793,22.855 71.793,23.114 71.793,23.449 79.756,31.412 U1.6
CHG_FET: D1.1 Q2.1 R10.2 R15.1
CHG_PIN: Q1.2 U2.2 | length 20.1
  Top Layer w0.254: U2.2 43.9,40.438 44.587,39.751 50.47,39.751 50.47,32.537 48.914,30.982 Q1.2
DSG_PIN: Q3.1 R9.2 U2.1 | length 10
  Top Layer w0.254: U2.1 41.783,38.85 44.196,36.437 R9.2 47.128,38.607 Q3.1
GND: C1.2 C2.1 C6.1 C7.1 C8.1 C9.2 C11.1 Cf.1 D3.2 J7.2 J8.1 J8.2 Q1.1 R1.1 R18.1 RSNS.2 U2.3 | length 30.9
  Top Layer w0.254: Cf.1 34.798,50.673 36.322,49.149 v1(38.227,49.149) ; v1(39.37,41.021) 39.404,41.055 41.749,41.055 U2.3
  Bottom Layer w1: v1(38.227,49.149) 38.227,43.712 39.318,42.621 39.318,41.073 v1(39.37,41.021)
  Bottom Layer w2: v1(39.37,41.021) 39.878,40.513 v1(39.878,26.416)
  other v1: 39.878,28.194
GPIOAlert: J1.14 U2.20 | length 18.4
  Top Layer w0.254: v1(34.163,37.846) 34.417,37.846 35.77,39.199 35.77,39.71 35.848,39.788 U2.20
  Bottom Layer w0.254: J1.14 32.512,36.195 v1(34.163,37.846)
GPIOBoot: J1.16 Q0.1 | length 10.1
  Top Layer w0.254: J1.16 37.023,21.143 Q0.1
NetC1_1: C1.1 R1.2 U2.17 | length 19.2
  Top Layer w0.254: R1.2 27.127,30.743 27.709,30.161 C1.1 28.973,33.083 29.126,33.236 29.126,37.215 33.649,41.738 U2.17
NetC2_2: C2.2 C3.1 Q0.2 R2.2 U2.16 | length 58.6
  Top Layer w0.254: C3.1 15.511,56.114 16.274,56.114 21.577,50.811 21.577,50.652 21.8,50.429 21.959,50.429 21.978,50.41 23.647,50.41 23.889,50.168 23.889,49.009 26.594,46.304 26.594,44.385 28.591,42.388 U2.16 36.107,42.324 36.956,42.324 37.719,41.561 v1(37.719,37.846) ; Q0.2 38.956,13.84 38.956,17.239 v1(38.989,17.272)
  Bottom Layer w0.254: v1(37.719,37.846) 37.719,18.542 v1(38.989,17.272)
NetC3_2: C3.2 C4.1 R3.2 U2.15 | length 38.1
  Top Layer w0.254: C4.1 C3.2 22.123,57.658 28.308,51.473 28.308,50.546 31.623,50.546 35.945,46.224 36.956,46.224 37.209,45.971 37.209,45.468 37.211,45.466 37.211,43.038 U2.15
  Top Layer w0.5: R3.2 13.259,58.166 13.767,57.658 C3.2
NetC4_2: C4.2 C5.1 R4.2 U2.13 U2.14 | length 43.7
  Top Layer w0.254: R4.2 11.684,61.826 13.208,60.302 v1(13.208,60.198) 14.566,61.556 14.944,61.556 C4.2 ; C5.1 26.289,48.539 30.49,44.338 ; v1(28.423,43.993) 28.768,44.338 30.49,44.338 ; U2.14 U2.13 30.49,44.338
  Bottom Layer w0.254: v1(13.208,60.198) 13.233,60.173 13.233,59.182 v1(28.423,43.993)
NetC5_2: C5.2 R5.2 U2.12 | length 17.4
  Top Layer w0.254: R5.2 C5.2 27.203,51.435 27.8,50.838 27.8,48.349 31.161,44.988 U2.12
NetC6_2: C6.2 U2.7 | length 35.8
  Top Layer w0.254: U2.7 39.751,43.688 38.354,42.291 38.354,40.6 40.107,38.847 40.578,38.847 42.331,37.095 42.331,35.687 40.281,35.687 40.132,35.538 40.132,30.408 41.104,29.436 43.533,29.436 43.815,29.718 43.815,32.512 44.323,33.02 45.822,33.02 46.33,32.512 46.33,30.161 C6.2
NetC7_2: C7.2 U2.9 | length 27.1
  Top Layer w0.254: v1(40.132,47.117) 40.199,47.05 40.199,45.723 40.87,45.052 41.719,45.052 U2.9 ; v1(52.984,32.055) 53.806,31.234 C7.2
  Bottom Layer w0.254: v1(40.132,47.117) 40.005,46.99 40.005,43.18 51.13,32.055 v1(52.984,32.055)
NetC9_1: C9.1 C10.2 R18.2 U2.18 | length 20.2
  Top Layer w0.254: U2.18 34.9,41.088 32.639,38.827 32.639,30.584 33.062,30.161 35.622,30.161 36.449,30.988 C10.2
NetC10_1: C10.1 C11.2 R19.2 U2.19 | length 17.6
  Top Layer w0.254: U2.19 37.062,40.438 37.211,40.289 37.211,39.111 36.703,38.603 36.703,37.294 37.849,36.148 C10.1 ; C11.2@38.227,29.78 C11.2@38.227,30.099 ; C11.2@38.608,30.291 38.608,31.902 37.849,32.661 C10.1 ; R19.2 39.999,36.512 39.624,36.137 39.624,34.874 39.04,34.29 C10.1
NetC16_1: C16.1 L1.1 U3.8 | length 7.2
  Bottom Layer w0.5: v1(88.646,13.462) v1(95.123,10.287)
NetC16_2: C16.2 U3.1
NetC18_2: C18.2 R12.1
NetC19_2: C19.2 R12.2 U3.6
NetD1_2: D1.2 Q1.3 R15.2 | length 40.2
  Top Layer w0.254: v1(44.944,32.004) 44.944,31.729 45.452,31.221 Q1.3 ; D1.2 73.89,29.587 R15.2 73.89,32.679 74.418,33.207 75.117,33.207 v1(75.311,33.401)
  Bottom Layer w0.254: v1(44.944,32.004) 44.969,32.004 45.934,31.039 72.949,31.039 v1(75.311,33.401)
NetD2_1: D2.1 R16.2 R17.1 | length 22.2
  Top Layer w0.254: R16.2 25.409,39.043 D2.1 27,37.465 27.997,38.461 v1(27.997,40.29) ; R17.1 29.464,48.158 v1(30.378,47.244)
  Bottom Layer w0.254: v1(27.997,40.29) 30.378,42.672 v1(30.378,47.244)
NetD2_2: D2.2 D3.1 J8.3 J8.4 R5.1 R16.1
NetJ7_1: J7.1 R6.1 U2.6 | length 60.3
  Top Layer w0.254: J7.1 38.989,6.147 38.873,6.263 R6.1 38.873,9.627 46.482,17.236 46.482,23.571 50.546,27.635 54.61,27.635 54.864,27.889 54.864,31.674 53.467,33.071 52.07,33.071 51.816,33.325 51.816,40.589 50.114,42.291 46.66,42.291 45.187,43.764 43.77,43.764 43.044,43.038 U2.6
NetP1_1: P1.1 R2.1
NetP1_2: P1.2 P1.3 R3.1
NetP1_4: P1.4 R4.1
NetQ0_3: Q0.3 R6.2 | length 6.6
  Top Layer w0.254: R6.2 37.073,11.278 37.973,12.178 Q0.3
NetQ2_2: Q2.2 Q3.2 | length 6.8
  Top Layer w0.254: Q3.2 58.674,36.322 58.801,36.449 Q2.2
NetQ3_3: Q3.3 R9.1 R19.1 RSNS.1 | length 13.1
  Top Layer w0.254: RSNS.1@42.037,30.108 42.037,32.08 41.275,32.842 R19.1 43.078,34.862 43.153,34.937 R9.1 46.482,34.937 47.382,34.037 Q3.3
NetR11_2: R11.2 U3.4
NetR13_1: R13.1 R14.2 U3.5
SCL_3.3V: J2.19 R7.1 U2.5 | length 53.3
  Top Layer w0.254: U2.5 44.242,42.388 v1(44.602,42.748) ; R7.1 v1(53.162,47.371) 59.36,47.371 65.583,41.148 65.583,30.099 61.798,26.314 61.798,21.768 J2.19
  Bottom Layer w0.254: v1(44.602,42.748) 48.539,42.748 v1(53.162,47.371)
SDA_3.3V: J2.21 R8.1 U2.4 | length 59.1
  Top Layer w0.254: U2.4 43.352,41.738 43.383,41.707 45.695,41.707 v1(46.05,41.351) ; v1(52.146,43.028) 51.232,43.942 R8.1 50.165,43.942 49.911,44.196 49.911,48.539 59.106,48.539 66.504,41.141 66.504,32.797 66.726,32.575 66.726,21.768 J2.21
  Bottom Layer w0.254: v1(46.05,41.351) 50.47,41.351 v1(52.146,43.028)
pads on no net: J1.1 J1.2 J1.3 J1.4 J1.5 J1.6 J1.7 J1.8 J1.9 J1.10 J1.12 J1.15 J2.1 J2.2 J2.3 J2.4 J2.5 J2.6 J2.7 J2.8 J2.9 J2.10 J2.11 J2.12 J2.13 J2.14 J2.15 J2.16 J2.17 J2.18 J2.20 J2.22 J2.23 J2.24 J2.26 J2.28 J2.29 J2.30 J3.1 J3.2 J3.3 J3.4 J3.5 J3.6 J3.7 J3.8 J3.9 J3.10 J3.11 J3.12 J3.13 J3.14 J3.15 J3.16 J3.17 J3.18 J3.19 J3.20 J3.21 J3.22 J3.23 J3.24 J3.25 J3.26 J3.27 J3.28 J3.29 J3.30 J3.31 J3.32 J3.33 J3.34 J4.1 J4.2 J4.3 J4.4 J4.5 J4.6 J4.7 J4.8 J4.9 J4.10 J4.11 J4.12 J4.13 J4.14 J4.15 J4.16 J4.17 J4.18 J4.19 J4.20 U2.11

## Polygon pours and split planes (outlines as drawn)
BAT- on Top Layer "BAT-_L01_P116" (solid, pour order 116): 96.266,36.957 cw(c96.266,36.068) 97.155,36.068 97.155,33.401 cw(c96.52,33.401) 96.52,32.766 89.281,32.766 cw(c89.281,33.401) 88.646,33.401 88.646,36.322 cw(c89.281,36.322) 89.281,36.957
BAT+ on Top Layer "Top Layer-BAT+" (solid, pour order 107): 29.845,50.927 29.373,50.927 cw(c29.373,51.656) 28.644,51.656 28.417,60.969 cw(c29.433,60.969) 29.433,61.985 98.267,61.985 cw(c98.517,60.584) 99.918,60.833 99.918,38.471 99.949,38.481 99.949,14.351 97.282,14.351 cw(c97.282,14.859) 96.774,14.859 ccw(c96.52,14.859) 96.52,15.113 94.615,15.113 cw(c94.615,15.748) 93.98,15.748 93.98,16.637 cw(c94.869,16.637) 94.869,17.526 96.52,17.526 ccw(c96.52,18.923) 97.917,18.923 97.917,21.971 ccw(c97.282,21.971) 97.282,22.606 96.393,22.606 cw(c96.393,23.622) 95.377,23.622 95.377,29.083 cw(c96.012,29.083) 96.012,29.718 ccw(c96.012,31.496) 97.79,31.496 97.79,36.957 ccw(c97.155,36.957) 97.155,37.592 97.183,37.601 94.076,37.601 cw(c94.076,38.871) 92.806,38.871 92.806,50.809 ccw(c90.266,50.809) 90.266,53.349 41.969,53.349 cw(c39.272,111.62) 35.265,53.424 ccw(c35.179,52.235) 33.988,52.168 33.993,52.075 33.993,51.9 cw(c33.02,51.9) 33.02,50.927
NetC16_1 on Top Layer "NETC16_1_L01_P014" (solid, pour order 14): 80.518,7.626 84.836,7.626 90.297,13.087 90.297,14.738 90.17,14.865 88.265,14.865 85.471,12.071 80.518,12.071
BAT- on Top Layer "Top Layer-BAT-" (solid, pour order 82): 90.926,0.514 100.116,0.514 100.116,13.926 100.029,14.013 98.378,14.013 98.378,7.753 93.552,7.753 93.552,17.833 93.616,17.896 95.281,19.805 95.281,21.977 cw(c95.28,22.134) 95.123,22.135 95.123,27.94 ccw(c94.107,27.94) 94.107,28.956 91.948,28.956 ccw(c91.948,27.844) 90.836,27.844 90.836,19.068 ccw(c91.199,18.705) 90.776,18.413 90.923,0.851 ccw(c91.005,0.683)
NetC16_1 on Top Layer "NETC16_1_L01_P041" (solid, pour order 41): 94.361,12.706 95.885,12.706 95.885,9.277 94.361,9.277
NetC2_2 on Top Layer "NETC2_2_L01_P108" (solid, pour order 108): 15.116,51.022 ccw(c15.116,51.653) 15.748,51.653 15.748,56.261 ccw(c15.221,56.261) 15.221,56.788 14.92,56.788 cw(c13.646,457.685) 11.938,56.79 ccw(c11.864,56.02) 11.094,56.094 cw(c-264.436,56.094) 11.068,52.281 ccw(c12.525,52.261) 11.499,51.226 ccw(c12.201,51.934) 12.236,50.938 cw(c20.929,-197.953)
5VIN on Top Layer "5VIN_L01_P120" (solid, pour order 120): 89.916,1.524 cw(c88.9,1.524) 88.9,0.508 78.74,0.508 cw(c78.74,2.921) 76.327,2.921 76.327,16.764 cw(c77.216,16.764) 77.216,17.653 ccw(c77.216,18.288) 77.851,18.288 77.851,25.908 cw(c80.391,25.908) 80.391,28.448 90.17,28.448 cw(c90.17,28.067) 90.551,28.067 90.551,22.987 cw(c89.662,22.987) 89.662,22.098 87.122,22.098 ccw(c87.122,21.463) 86.487,21.463 86.487,19.812 cw(c85.979,19.812) 85.979,19.304 81.788,19.304 ccw(c81.788,18.161) 80.645,18.161 80.645,12.954 cw(c80.264,12.954) 80.264,12.573 ccw(c80.264,12.192) 79.883,12.192 79.883,6.096 ccw(c80.01,6.096) 80.01,5.969 85.598,5.969 89.916,11.938
BAT- on Top Layer "BAT-_L01_P115" (solid, pour order 115): 81.788,35.56 cw(c82.042,35.56) 82.042,35.814 82.55,35.814 cw(c82.55,35.56) 82.804,35.56 82.804,33.401 ccw(c83.058,33.401) 83.058,33.147 84.455,33.147 cw(c84.455,32.639) 84.963,32.639 84.963,30.988 cw(c84.582,30.988) 84.582,30.607 82.169,30.607 cw(c82.169,30.988) 81.788,30.988
BAT- on Top Layer "BAT-_L01_P114" (solid, pour order 114): 80.518,40.386 ccw(c79.883,40.386) 79.883,41.021 cw(c79.883,41.656) 79.248,41.656 79.248,43.307 cw(c79.502,43.307) 79.502,43.561 82.169,43.561 cw(c82.169,43.18) 82.55,43.18 82.55,41.783 cw(c81.915,41.783) 81.915,41.148 ccw(c81.915,40.767) 81.534,40.767 81.534,38.1 cw(c81.28,38.1) 81.28,37.846 80.899,37.846 cw(c80.899,38.227) 80.518,38.227
"3.3 VIN" on Top Layer "3.3_VIN_L01_P113" (solid, pour order 113): 73.533,35.941 cw(c73.914,35.941) 73.914,36.322 77.978,36.322 cw(c77.978,35.306) 78.994,35.306 78.994,33.401 cw(c78.359,33.401) 78.359,32.766 77.851,32.766 cw(c77.851,33.147) 77.47,33.147 ccw(c76.2,33.147) 76.2,34.417 74.041,34.417 cw(c74.041,34.925) 73.533,34.925
CHG_FET on Top Layer "CHG_FET_L01_P112" (solid, pour order 112): 67.31,34.163 cw(c69.469,34.163) 69.469,36.322 72.009,36.322 cw(c72.009,35.306) 73.025,35.306 73.025,27.813 cw(c72.39,27.813) 72.39,27.178 71.12,27.178 cw(c71.12,27.686) 70.612,27.686 70.612,30.861 ccw(c69.088,30.861) 69.088,32.385 cw(c69.088,34.163)
BAT- on Top Layer "BAT-_L01_P111" (solid, pour order 111): 67.31,38.862 cw(c69.85,38.862) 69.85,41.402 72.644,41.402 cw(c72.644,40.767) 73.279,40.767 73.279,39.243 ccw(c73.787,39.243) 73.787,38.735 74.803,38.735 cw(c74.803,37.846) 75.692,37.846 75.692,36.957 cw(c75.184,36.957) 75.184,36.449 68.58,36.449 cw(c68.58,37.719) 67.31,37.719
GND on Top Layer "Top Layer-GND" (solid, pour order 110): 18.796,32.639 ccw(c19.558,32.639) 19.558,31.877 23.749,31.877 cw(c23.749,31.623) 24.003,31.623 24.003,30.099 ccw(c24.892,30.099) 24.892,29.21 40.373,29.069 cw(c40.55,28.457) 40.626,29.09 ccw(c41.836,112.556) 46.461,29.209 cw(c46.48,28.895) 46.482,29.21 54.229,29.21 54.229,28.194 cw(c54.102,28.194) 54.102,28.067 47.371,28.067 ccw(c47.371,26.543) 45.847,26.543 cw(c44.577,26.543) 44.577,25.273 9.621,25.273 ccw(c10.414,22.86) 7.874,22.86 7.874,7.366 ccw(c10.414,7.366) 10.414,4.826 37.211,4.826 cw(c37.211,4.064) 37.973,4.064 37.973,2.286 cw(c37.338,2.286) 37.338,1.651 4.826,1.651 cw(c4.826,4.191) 2.286,4.191 2.286,31.242 ccw(c0.762,31.242) 0.762,32.766 cw(c0.762,33.147) 0.381,33.147 0.381,49.149 cw(c1.651,49.149) 1.651,50.419 14.478,50.419 ccw(c14.478,52.07) 16.129,52.07 16.129,52.959 cw(c16.51,52.959) 16.51,53.34 17.018,53.34 cw(c17.018,52.959) 17.399,52.959 17.399,50.927 cw(c17.018,50.927) 17.018,50.546 ccw(c17.018,49.022) 15.494,49.022 15.494,47.752 cw(c14.097,47.752) 14.097,46.355 2.032,46.355 ccw(c2.032,45.72) 1.397,45.72 1.397,37.465 ccw(c2.921,37.465) 2.921,35.941 16.256,35.941 cw(c16.256,33.401) 18.796,33.401
GND on Top Layer "GND_L01_P012" (solid, pour order 12): 34.29,52.324 47.879,52.324 47.879,51.054 34.29,51.054
NetC19_2 on Top Layer "NETC19_2_L01_P018" (solid, pour order 18): 83.439,16.77 83.439,18.675 84.963,18.675 84.963,16.77 85.471,16.77 85.725,16.516 90.424,16.516 90.424,16.643 90.424,16.77 90.424,17.405 88.392,17.405 88.392,18.167 85.852,18.167 85.344,18.675 84.963,18.675 84.963,16.77
NetC16_2 on Top Layer "NETC16_2_L01_P024" (solid, pour order 24): 96.139,10.928 97.663,10.928 97.663,12.706 96.012,14.357 96.012,14.738 94.107,14.738 93.98,14.738 93.98,13.976 94.869,13.976 96.139,12.706
BAT- on Top Layer "BAT-_L01_P027" (solid, pour order 27): 87.63,14.738 88.265,15.373 93.599,15.373 93.599,17.024 90.678,17.024 90.678,16.77 90.106,16.199 90.048,16.257 87.63,16.257 87.63,16.262 83.058,16.2 83.058,14.357 84.709,14.357 85.09,14.738
NetQ2_2 on Top Layer "NETQ2_2_L01_P095" (solid, pour order 95): 52.297,39.052 65.124,39.179 65.124,33.591 52.297,33.464
NetD2_2 on Top Layer "NETD2_2_L01_P099" (solid, pour order 99): 2.413,44.323 cw(c3.556,44.323) 3.556,45.466 15.24,45.466 ccw(c15.24,46.355) 16.129,46.355 16.129,48.895 cw(c17.018,48.895) 17.018,49.784 22.479,49.784 cw(c22.479,48.768) 23.495,48.768 23.495,32.639 cw(c23.241,32.639) 23.241,32.385 22.098,32.385 cw(c22.098,33.147) 21.336,33.147 21.336,38.1 ccw(c19.304,38.1) 19.304,40.132 4.191,40.132 cw(c4.191,41.91) 2.413,41.91
NetP1_1 on Top Layer "NETP1_1_L01_P043" (solid, pour order 43): 1.524,54.356 cw(c2.54,54.356) 2.54,55.372 10.414,55.372 10.414,53.086 2.54,53.086 cw(c2.603,54.165) 1.524,54.229
NetP1_2 on Top Layer "NETP1_2_L01_P063" (solid, pour order 63): 1.651,59.69 cw(c2.413,59.69) 2.413,60.452 6.096,60.452 cw(c6.096,59.69) 6.858,59.69 ccw(c7.62,59.69) 7.62,58.928 10.414,58.928 10.414,57.404 7.62,57.404 ccw(c7.429,56.579) 6.604,56.769 cw(c5.588,56.769) 5.588,55.753 2.54,55.753 cw(c2.54,56.642) 1.651,56.642
NetP1_4 on Top Layer "NETP1_4_L01_P042" (solid, pour order 42): 1.524,61.976 cw(c2.54,61.976) 2.54,62.992 10.414,62.992 10.414,60.706 2.54,60.706 cw(c2.603,61.785) 1.524,61.849
NetR11_2 on Top Layer "NETR11_2_L01_P023" (solid, pour order 23): 95.631,21.977 97.536,21.977 97.409,21.85 97.409,19.564 95.631,17.786 94.107,17.786 94.172,18.491 95.631,20.072
NetR13_1 on Top Layer "NETR13_1_L01_P020" (solid, pour order 20): 86.868,21.596 86.868,19.691 88.773,17.786 90.424,17.786 90.424,19.691 90.678,19.945 90.678,21.596
no net on Top Layer "NONET_L01_P080" (solid, pour order 80): 16.129,52.07 24.765,52.07 16.129,52.07
NetC18_2 on Top Layer "NETC18_2_L01_P017" (solid, pour order 17): 81.28,18.675 81.28,14.357 83.058,14.357 83.058,18.675
BAT- on Bottom Layer "BAT-_L02_P038" (solid, pour order 38): 0,0 0.127,0.127 99.949,0.127 99.949,85.471 99.822,85.344 0.254,85.344

## Silkscreen, mask and mechanical layers (free items; w line width, h text height)
Top Overlay:
  drawing of 13 lines, arcs and shapes, not listed
  text "WayWayWay" at 55.499,80.645 h1.52
  text "Sailbot Polaris BMS V1" at 1.905,80.264 h1.52
  text "Power Team 2025" at 1.905,74.93 h1.52

## Text inside footprints (layer, text, board x,y; h text height)
U3: Mechanical 13 "*" at 94.12,15.132 h1.27 r180